# EAGLE board v1 (EAGLE 9.6.2)

Size 160 x 100 mm. Coordinates in mm from the lower left corner, seen from the top.
Outline: 0,0 160,0 160,100 0,100 0,0
Copper layers (1*16): Top 0.035mm / dielectric 1.5mm / Bottom 0.035mm
Design rules "default": minimum track width 6mil, minimum drill 0.35mm, track to track 6mil, track to pad 6mil, pad to pad 6mil, via to via 6mil, smd to smd 6mil, copper to edge 40mil, drill to drill 6mil, minimum pad ring 10mil, minimum via ring 8mil, stop-mask expansion 4mil, vias tented up to drill 0mil, thermal gap 10mil

## Footprints (pad centres in the part's own frame; a part is rotated, then mirrored left to right if it is on the bottom)
C025-025X050 = drill 0.813 octagon: 1 -1.27,0; 2 1.27,0
QS = drill 0.61 long: 1 -2.54,0; 2 2.54,0
DO-1N4148 = drill 0.9: A -3.81,0; C 3.81,0
DIL28-3 = drill 0.813 long: 1 -16.51,-3.81; 2 -13.97,-3.81; 3 -11.43,-3.81; 4 -8.89,-3.81; 5 -6.35,-3.81; 6 -3.81,-3.81; 7 -1.27,-3.81; 8 1.27,-3.81; 9 3.81,-3.81; 10 6.35,-3.81; 11 8.89,-3.81; 12 11.43,-3.81; 13 13.97,-3.81; 14 16.51,-3.81; 15 16.51,3.81; 16 13.97,3.81; 17 11.43,3.81; 18 8.89,3.81; 19 6.35,3.81; 20 3.81,3.81; 21 1.27,3.81; 22 -1.27,3.81; 23 -3.81,3.81; 24 -6.35,3.81; 25 -8.89,3.81; 26 -11.43,3.81; 27 -13.97,3.81; 28 -16.51,3.81
REY5-19.0X15.0X15.0MM = drill 1.3 pad 2.184: 1 -8.1,0; 2 -6.1,-6; 3 -6.1,6; 4 6.1,-6; 5 6.1,6
LED5MM = drill 0.813 octagon: A -1.27,0; K 1.27,0
RFID-RC522 = drill 1.016 long: 3V3 -8.89,0; GND -3.81,0; IRQ -1.27,0; MISO 1.27,0; MOSI 3.81,0; RST -6.35,0; SCK 6.35,0; SS 8.89,0
0204/7 = drill 0.813 octagon: 1 -3.81,0; 2 3.81,0
B3F-10XX = drill 1.016 long: 1 -3.251,2.261; 2 3.251,2.261; 3 -3.251,-2.261; 4 3.251,-2.261
AL11P = drill 1.016 pad 1.905 octagon: + 2.286,0; - -2.286,0
TO92-EBC-OVAL = drill 0.813 long: B 0,-1.27; C 2.54,-1.27; E -2.54,-1.27

## Placement (x,y rotation side)
C1  10nF  [C025-025X050]  105.41,88.9 0 top
C2  22pF  [C025-025X050]  99.06,88.9 0 top
C3  22pF  [C025-025X050]  92.71,88.9 0 top
CRYSTAL  [QS]  114.3,87.63 0 top
D1  [DO-1N4148]  91.44,96.52 0 top
IC1  ATMEGA168-20P  [DIL28-3]  24.13,60.96 270 top
K1  HLS8L-DC5V-S-C  [REY5-19.0X15.0X15.0MM]  90.17,15.24 0 top
LED1  [LED5MM]  81.28,88.9 0 top
LED-VERMELHO  [LED5MM]  130.81,97.79 0 top
M1  [RFID-RC522]  119.38,63.5 0 top
R1  10k  [0204/7]  121.92,96.52 0 top
R2  10k  [0204/7]  111.76,96.52 0 top
R3  10k  [0204/7]  101.6,96.52 0 top
R4  220  [0204/7]  81.28,2.54 0 top
R5  220  [0204/7]  81.28,-2.54 0 top
S1  [B3F-10XX]  81.28,73.66 0 top
S2  [B3F-10XX]  134.62,88.9 0 top
SP1  AL11P  [AL11P]  133.35,76.2 0 top
T1  2N2222  [TO92-EBC-OVAL]  124.46,90.17 0 top

## Library data of the parts
C1-C3 = rcl; SPICEPREFIX: C
CRYSTAL = special
D1 IC1 T1 = adafruit
K1 = nosso_relay; MPN: HLS8L-DC5V-S-C
LED1 LED-VERMELHO = led
M1 = mfrc522-module
R1-R5 = rcl; SPICEPREFIX: R
S1 S2 = switch-omron; MPN: B3F-1000; OC_FARNELL: 176432; OC_NEWARK: 36M3542
SP1 = buzzer; OC_FARNELL: unknown; OC_NEWARK: unknown

## Nets
3.3V: M1.3V3
12V: K1.1
GND: C1.2 C2.2 C3.1 D1.C IC1.8 IC1.22 M1.GND R2.1 R4.1 R5.1 S1.4 SP1.-
N$1: IC1.1 R1.1 S1.1
N$2: IC1.4 LED-VERMELHO.A
N$3: LED-VERMELHO.K R4.2
N$4: IC1.6 LED1.A
N$5: LED1.K R5.2
N$6: IC1.5 SP1.+
N$7: IC1.13 S2.3
N$8: R2.2 S2.4
N$9: IC1.12 R3.1
N$10: R3.2 T1.B
N$11: D1.A K1.2 T1.E
N$12: C3.2 CRYSTAL.2 IC1.9
N$13: C2.1 CRYSTAL.1 IC1.10
N$14: IC1.15 M1.RST
N$15: IC1.16 M1.IRQ
N$16: IC1.17 M1.SCK
N$17: IC1.18 M1.MOSI
N$18: IC1.19 M1.SS
TRANCA: K1.5
VCC: C1.1 IC1.7 IC1.21 R1.2 S2.1 T1.C

## Tracks (layer width: path | path; a pad name or v marks a point on that pad's centre or on a via)
GND  (11 unrouted)
N$1  (2 unrouted)
N$2  (1 unrouted)
N$3  (1 unrouted)
N$4  (1 unrouted)
N$5  (1 unrouted)
N$6  (1 unrouted)
N$7  (1 unrouted)
N$8  (1 unrouted)
N$9  (1 unrouted)
N$10  (1 unrouted)
N$11  (2 unrouted)
N$12  (2 unrouted)
N$13  (2 unrouted)
N$14  (1 unrouted)
N$15  (1 unrouted)
N$16  (1 unrouted)
N$17  (1 unrouted)
N$18  (1 unrouted)
VCC  (5 unrouted)